# Altium PCB AudioAmp.PcbDoc
Units mm, origin at the board's own origin, x right, y up, seen from the top; angles counter-clockwise.
Board outline 65 x 48 mm, 2 copper layers (Top Layer, Bottom Layer); 152 components, 63 nets, 384 pads, 64 vias.
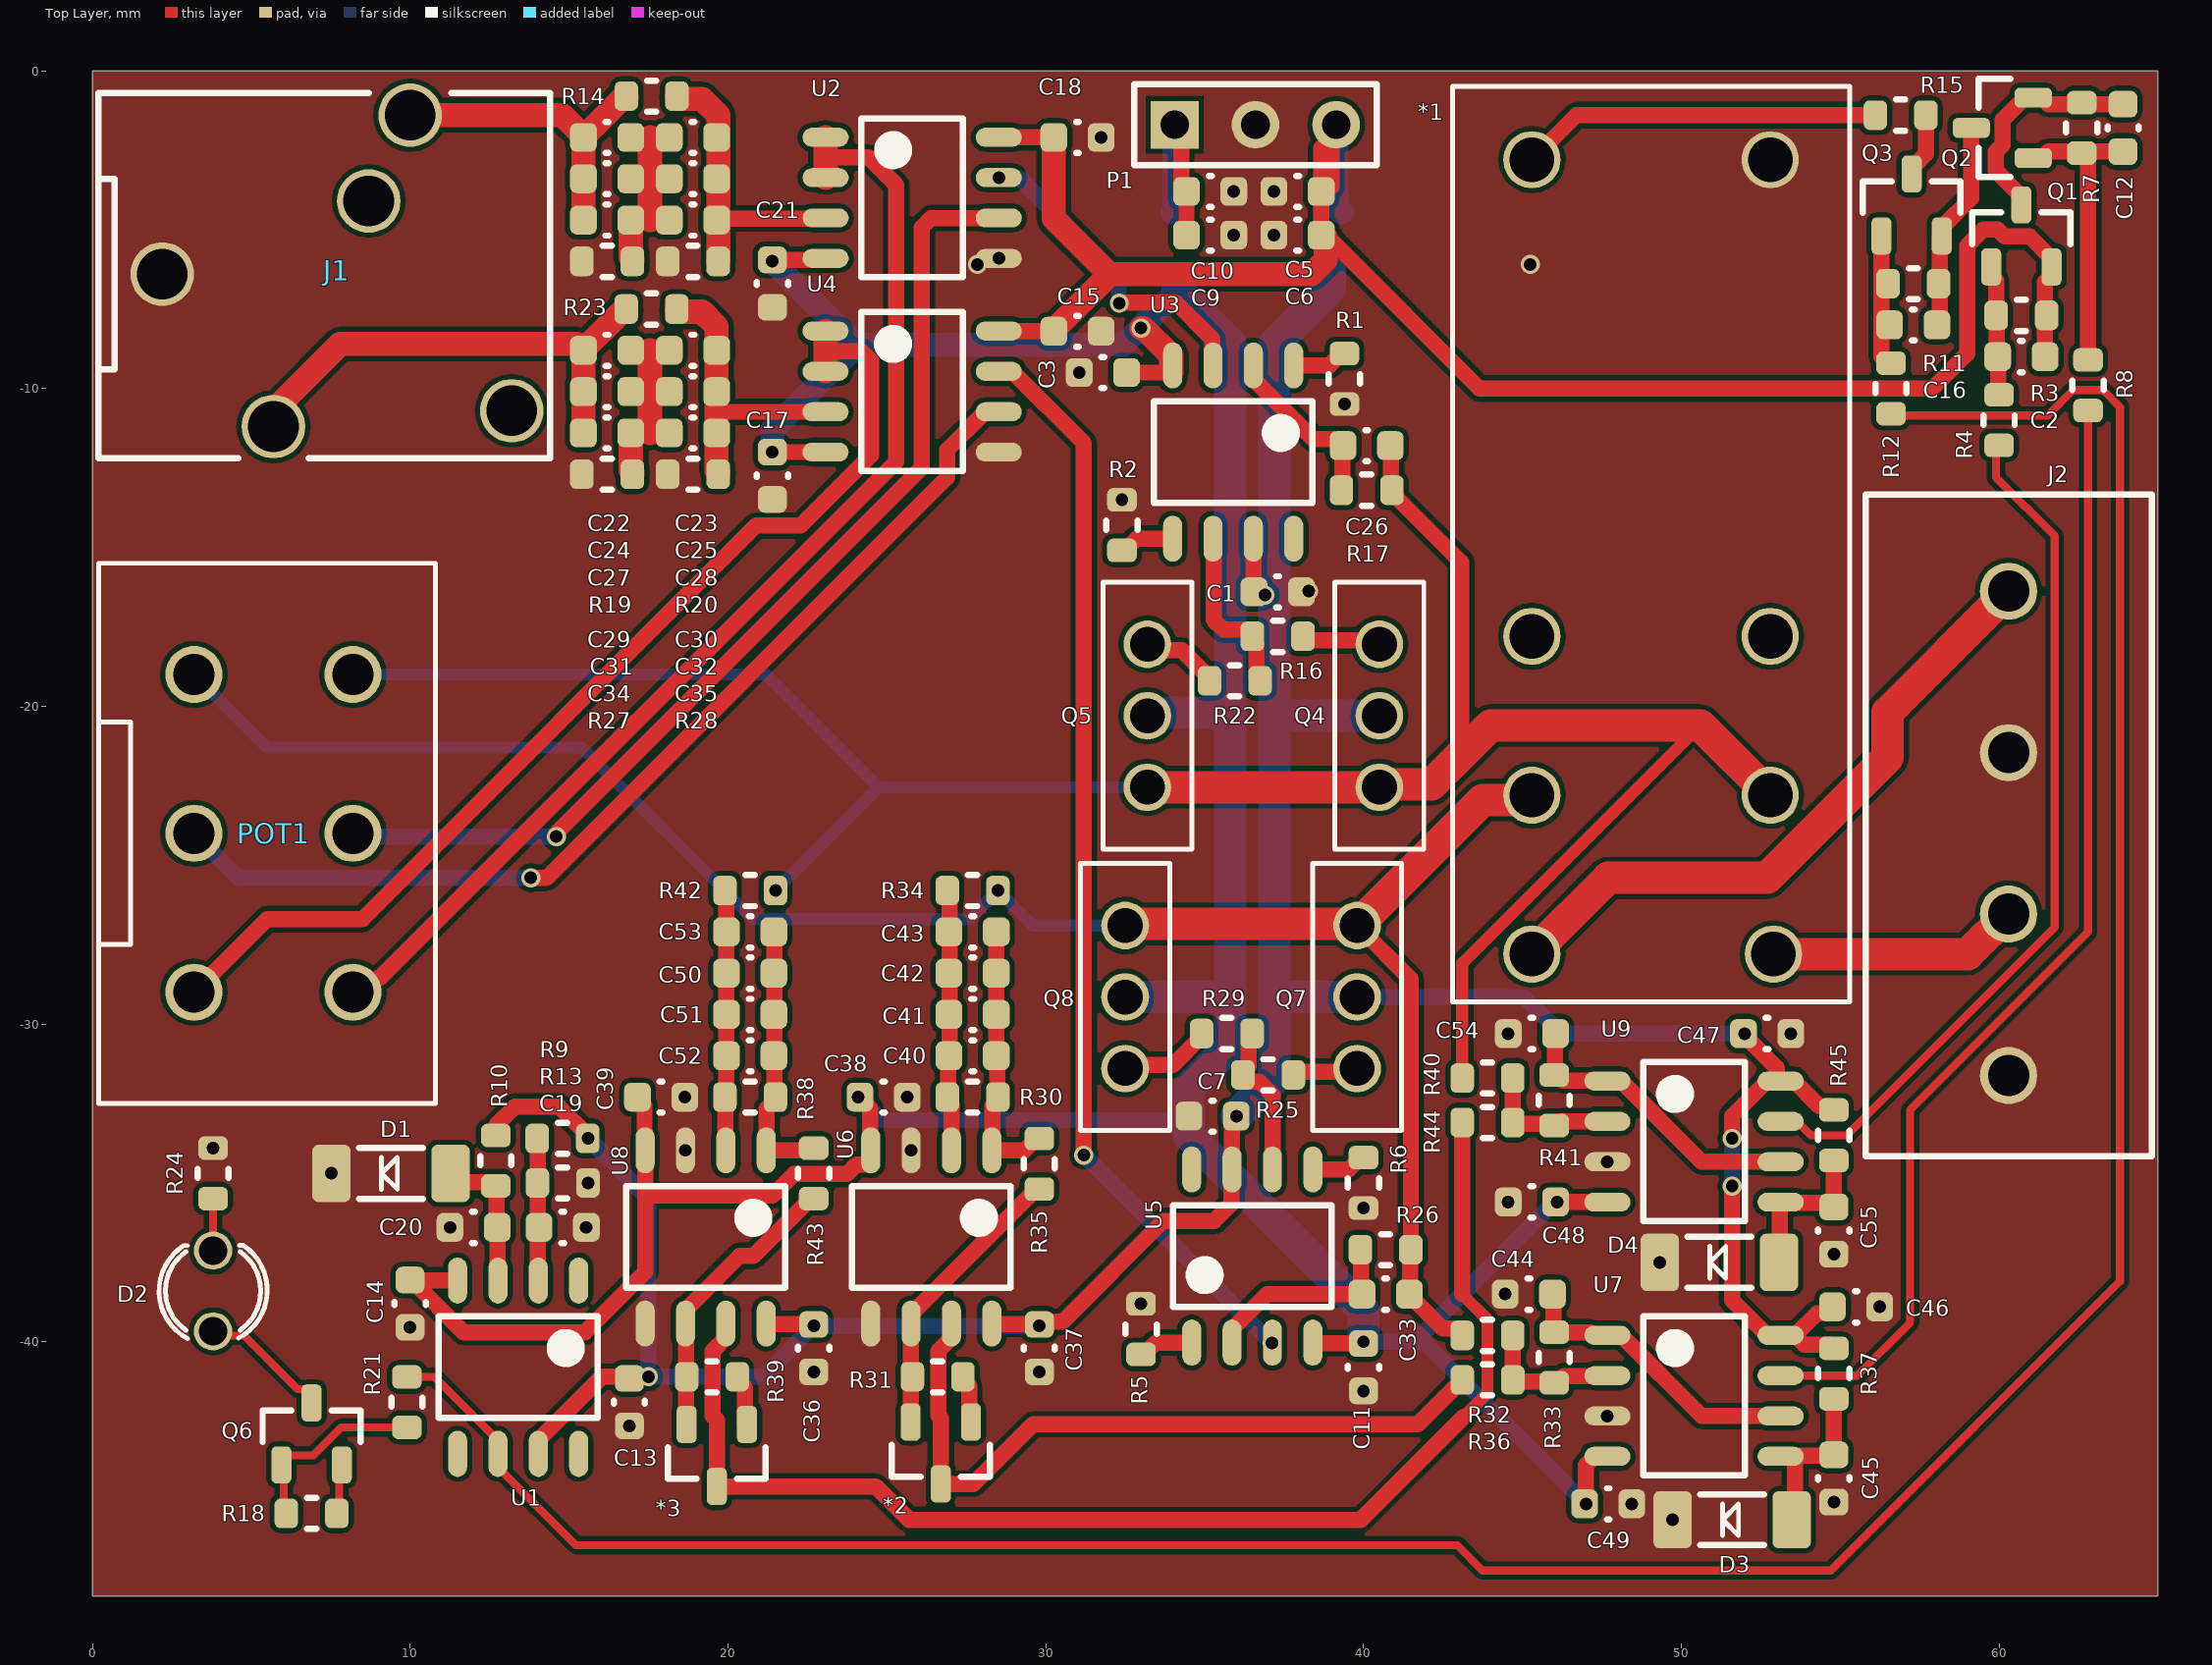
[diagram p0: Top Layer view]
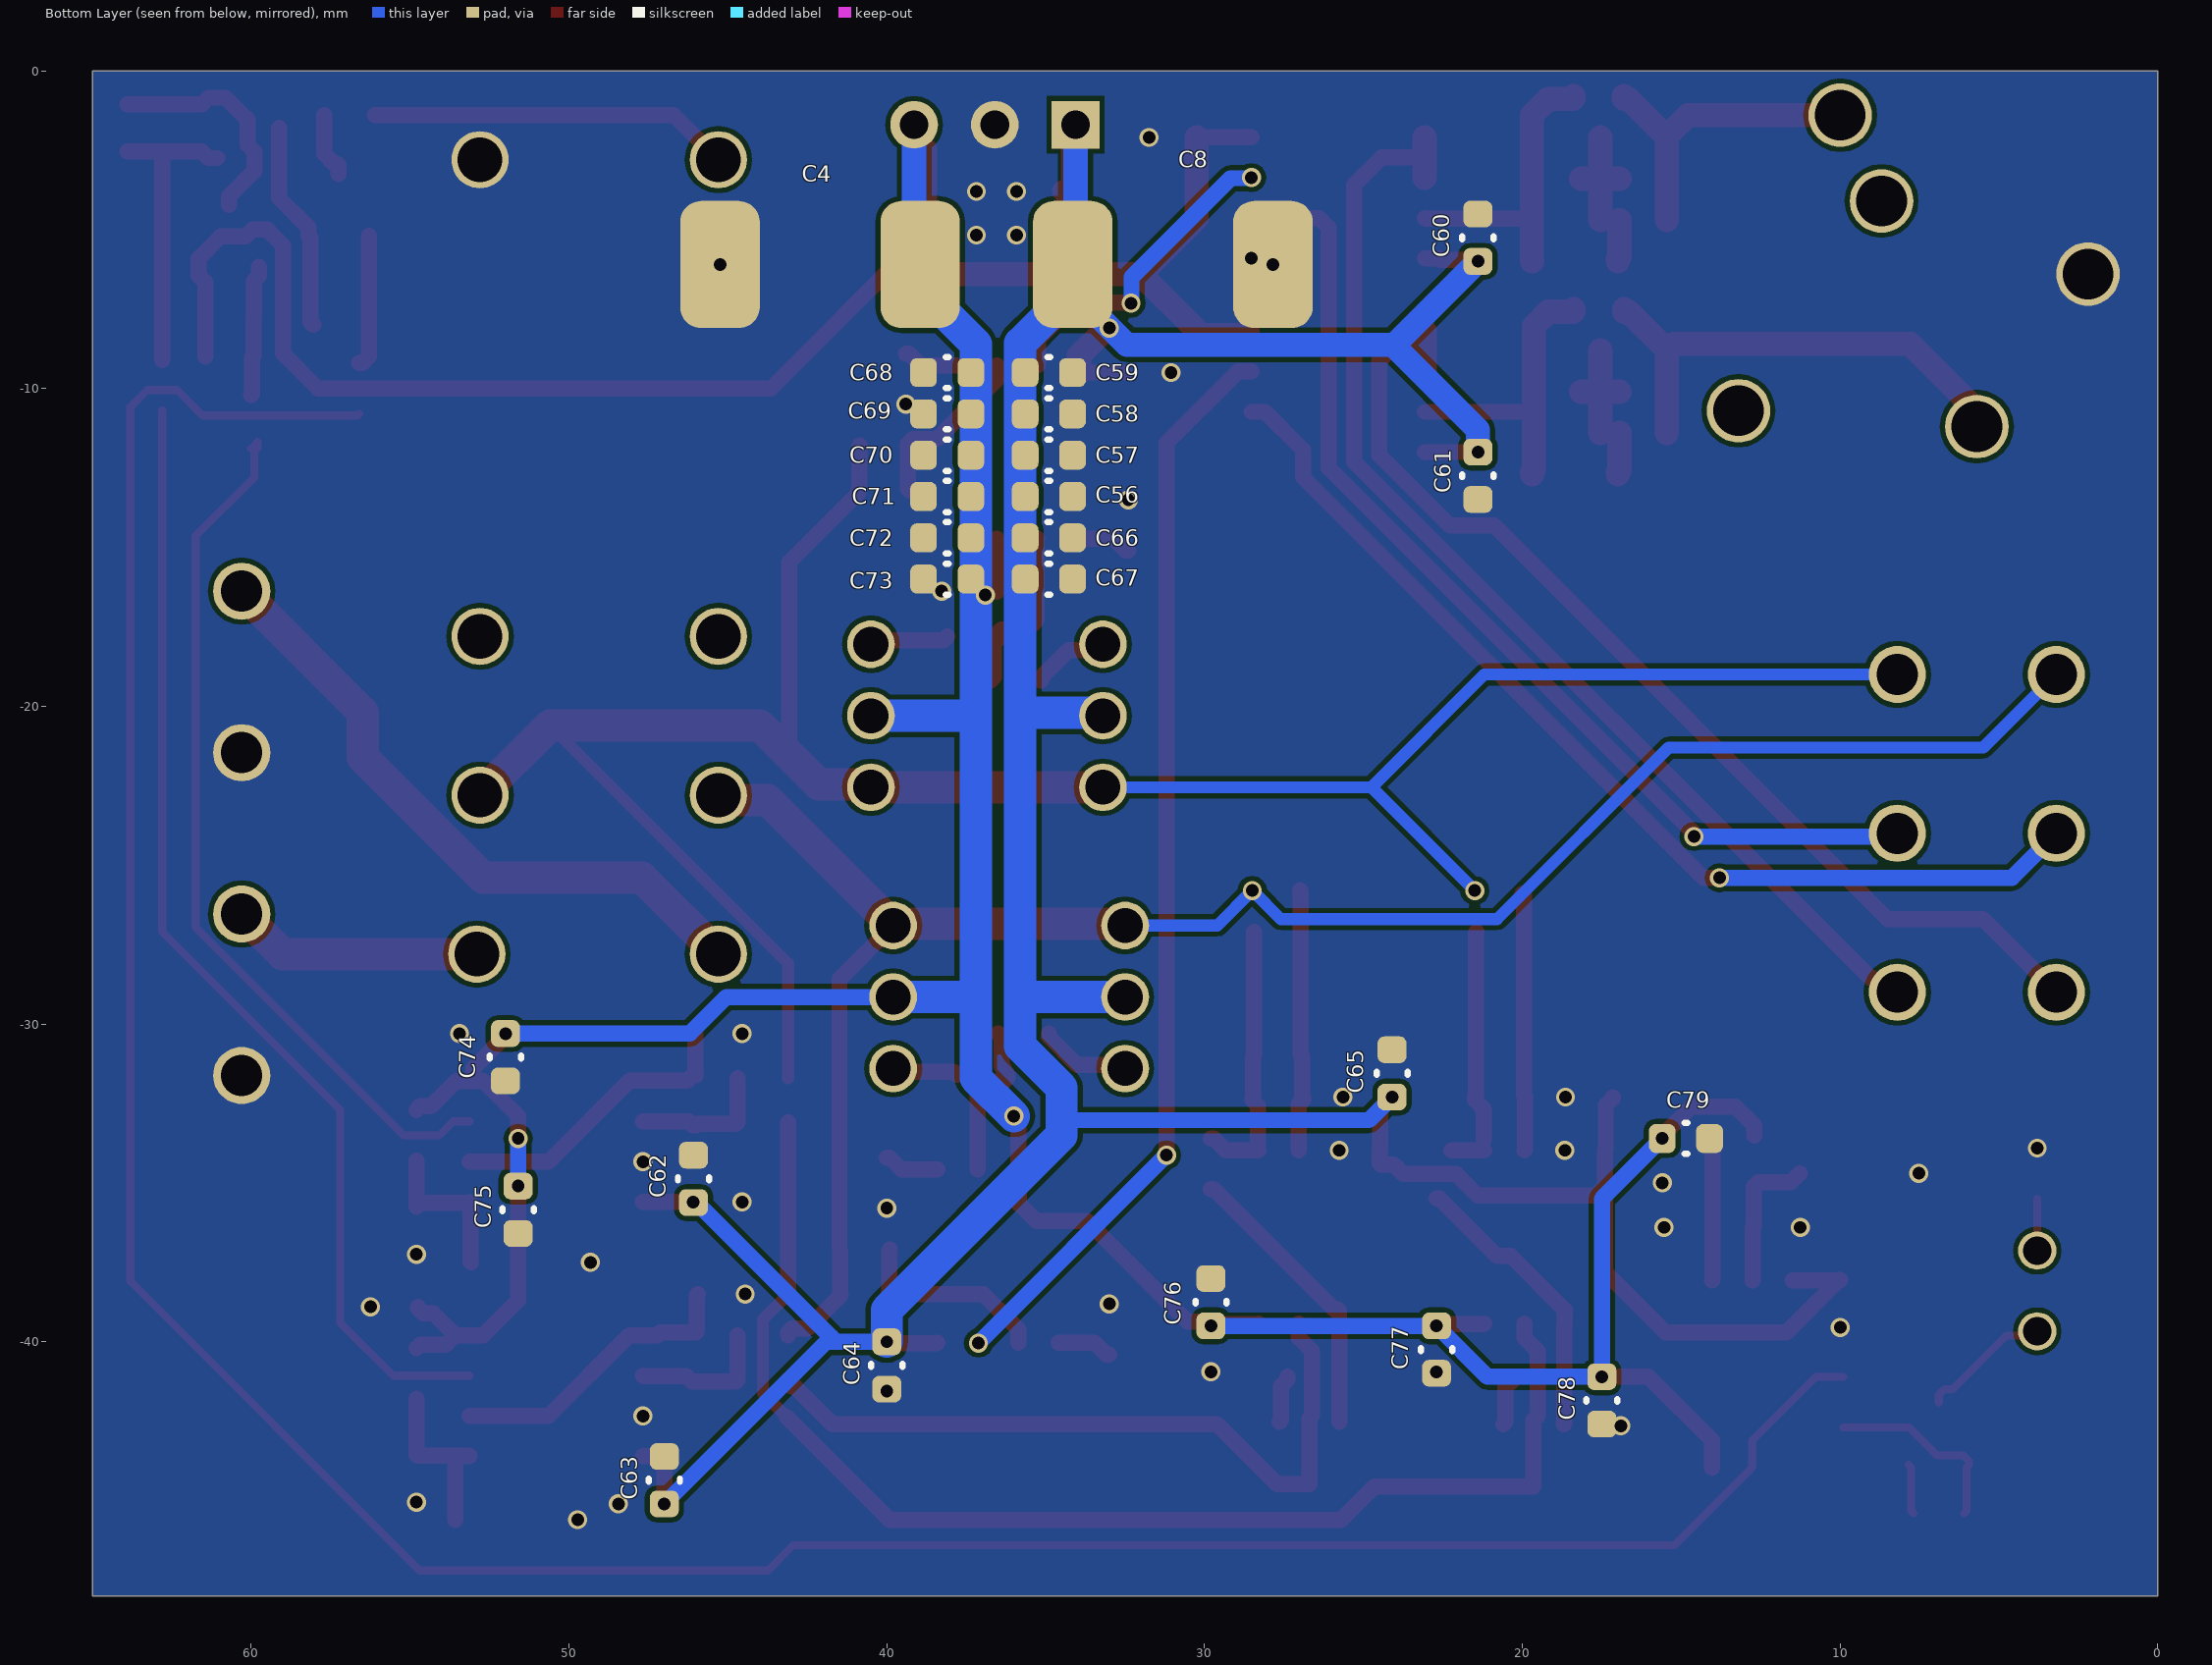
[diagram p1: Bottom Layer view, seen from below]
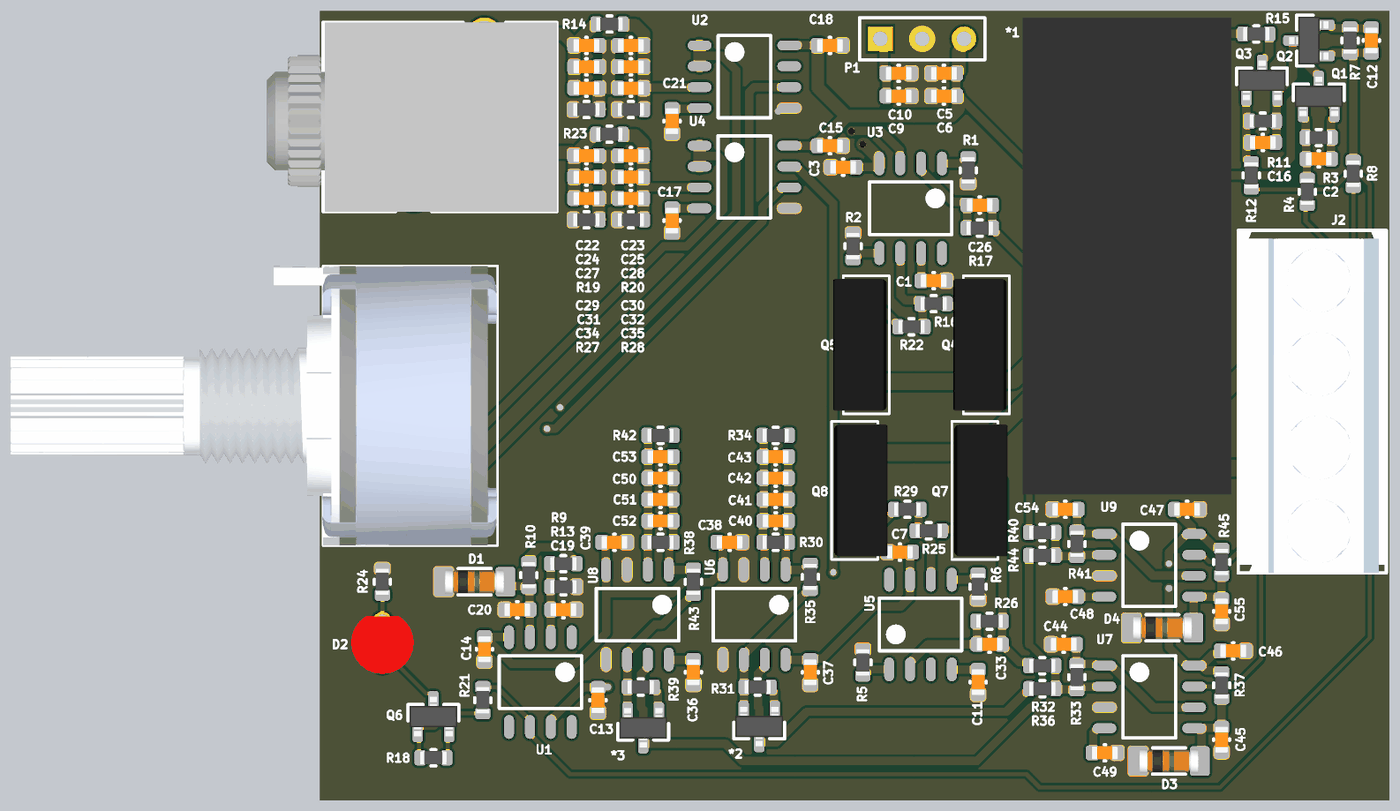
[diagram p2: 3D render of the assembled board from above, using the file's embedded part models]
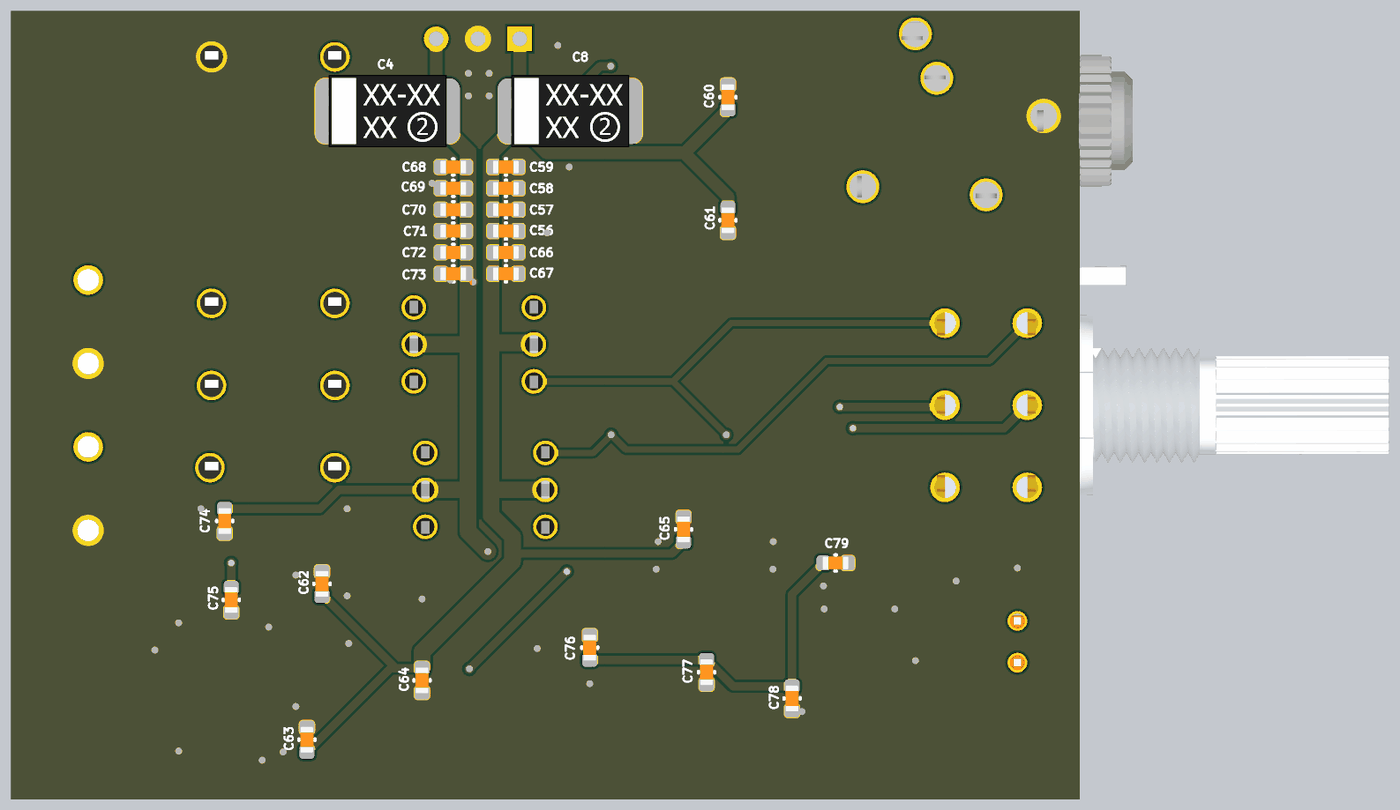
[diagram p3: 3D render of the assembled board from below, using the file's embedded part models]

## Layer stack, top to bottom
Top Solder: solder mask 0.0102, Solder Resist, Dk 3.5
Top Layer: signal copper 0.0356
Dielectric 1: dielectric 0.32, FR-4, Dk 4.8
Bottom Layer: signal copper 0.0356
Bottom Solder: solder mask 0.0102, Solder Resist, Dk 3.5

## Board outline
0,-48 0,0 65,0 65,-48

## Design rules (kind name [scope] priority, off if disabled: settings)
Clearance [All] p1: gap=0.15 ignorepadtopadclearanceinfootprint=FALSE except(0: Arc-Hole Track-Hole SMDPad-Hole THPad-Hole Via-Hole Fill-Hole Poly-Hole Region-Hole Text-Hole)
HoleSize [All] p1: absolutevalues=TRUE maxlimit=6.3 minlimit=0.2 maxpercent=80.000 minpercent=20.000
MinimumSolderMaskSliver [All] p1: minsoldermaskwidth=0.15
PlaneConnect [All] p1: planeconnectstyle=Direct reliefexpansion=0.508 reliefentries=4 reliefconductorwidth=0.254 reliefairgap=0.254
PolygonConnect [All] p1: connectstyle=Direct reliefconductorwidth=0.254 reliefentries=4 polygonreliefangle="90 Angle" airgapwidth=0.254
RoutingVias [All] p1: holewidth=0.6 width=0.35 viastyle="Through Hole" minholewidth=0.35 minwidth=0.3 maxholewidth=1.7 maxwidth=1.5
SilkToSilkClearance [All] p1: silktosilkclearance=0.15
SilkToSolderMaskClearance [IsPad] p1: minsilkscreentomaskgap=0.08 clearancetoexposedcopper=TRUE
SolderMaskExpansion [All] p1: expansion=0.045 istentingtop=FALSE
Width [All] p1: maxlimit=1.524 minlimit=0.203 preferedwidth=0.254 minimp=50.000000 maximp=50.000000 favimp=50.000000
25 further rules are at their usual default settings.

## Classes and differential pairs
channel class DC_DETECT: U_DC_DETECT1 U_DC_DETECT2
component class U_DC_DETECT2: *2_U_DC_DETECT2 *3 C36_U_DC_DETECT2 C37_U_DC_DETECT2 C38_U_DC_DETECT2 C39_U_DC_DETECT2 C40_U_DC_DETECT2 C41_U_DC_DETECT2 C42_U_DC_DETECT2 C43_U_DC_DETECT2 C44_U_DC_DETECT2 C45_U_DC_DETECT2 C46 C47 C48 C49 C50 C51 C52 C53 C54 C55 D3_U_DC_DETECT2 D4 R30_U_DC_DETECT2 R31_U_DC_DETECT2 R32_U_DC_DETECT2 R33_U_DC_DETECT2 R34_U_DC_DETECT2 R35_U_DC_DETECT2 R36_U_DC_DETECT2 R37_U_DC_DETECT2 R38 R39 R40 R41 R42 R43 R44 R45 U6_U_DC_DETECT2 U7_U_DC_DETECT2 U8 U9
component class U_DC_DETECT1: *2 *2_U_DC_DETECT1 C36 C36_U_DC_DETECT1 C37 C37_U_DC_DETECT1 C38 C38_U_DC_DETECT1 C39 C39_U_DC_DETECT1 C40 C40_U_DC_DETECT1 C41 C41_U_DC_DETECT1 C42 C42_U_DC_DETECT1 C43 C43_U_DC_DETECT1 C44 C44_U_DC_DETECT1 C45 C45_U_DC_DETECT1 D3 D3_U_DC_DETECT1 R30 R30_U_DC_DETECT1 R31 R31_U_DC_DETECT1 R32 R32_U_DC_DETECT1 R33 R33_U_DC_DETECT1 R34 R34_U_DC_DETECT1 R35 R35_U_DC_DETECT1 R36 R36_U_DC_DETECT1 R37 R37_U_DC_DETECT1 U6 U6_U_DC_DETECT1 U7 U7_U_DC_DETECT1
component class AudioAmp: *1 C1 C2 C3 C4 C5 C6 C7 C8 C9 C10 C11 C12 C13 C14 C15 C16 C17 C18 C19 C20 C21 C22 C23 C24 C25 C26 C27 C28 C29 C30 C31 C32 C33 C34 C35 C56 C57 C58 C59 C60 C61 C62 C63 C64 C65 C66 C67 C68 C69 C70 C71 C72 C73 C74 C75 C76 C77 C78 C79 D1 D2 J1 J2 P1 POT1 Q1 Q2 Q3 Q4 Q5 Q6 Q7 Q8 R1 R2 R3 R4 R5 R6 R7 R8 R9 R10 R11 R12 R13 R14 R15 R16 R17 R18 R19 R20 R21 R22 R23 R24 R25 R26 R27 R28 R29 R30_U_DC_DETECT1 R31_U_DC_DETECT1 U1 U2 U3 U4 U5

## Components (designator, comment, footprint, x,y, rotation, side; value= is the part's Value field where it differs from the comment)
*1 "RELAY_G2RL-2" G2RL-2 49.05,-14.9 r270 top
*2 "BAV99" SOT23_123_N 26.7,-43.5 r180 top
*3 "BAV99" SOT23_123_N 19.65,-43.575 r180 top (schematic designator *2)
C1 "100n" C0603_N 37.3,-16.4 r180 top
C2 "100n" C0603_N 60.7,-9 r0 top
C3 "100n" C0603_N 31.8,-9.5 r0 top
C4 "100u" C_TR3D 42.1,-6.1 r180 bottom
C5 "100n" C0603_N 37.925,-3.8 r180 top
C6 "100n" C0603_N 37.925,-5.175 r180 top
C7 "100n" C0603_N 35.25,-32.9 r0 top
C8 "100u" C_TR3D 31,-6.1 r180 bottom
C9 "100n" C0603_N 35.175,-5.175 r180 top
C10 "100n" C0603_N 35.175,-3.8 r180 top
C11 "100n" C0603_N 40,-40.8 r90 top
C12 "100n" C0603_N 63.9,-1.8 r90 top
C13 "CAP" C0603_N 16.9,-41.9 r90 top
C14 "CAP" C0603_N 10,-38.8 r90 top
C15 "100n" C0603_N 31,-8.2 r180 top
C16 "100n" C0603_N 57.3,-8 r0 top
C17 "100n" C0603_N 21.4,-12.745 r90 top
C18 "100n" C0603_N 31,-2.1 r180 top
C19 "100n" C0603_N 14.8,-36.4 r0 top (schematic designator C20)
C20 "100n" C0603_N 12,-36.4 r180 top (schematic designator C19)
C21 "100n" C0603_N 21.4,-6.7 r90 top
C22 "100n" C0603_N 16.2,-2.1 r0 top (schematic designator C29)
C23 "100n" C0603_N 18.9,-2.1 r0 top (schematic designator C30)
C24 "100n" C0603_N 16.2,-3.4 r0 top (schematic designator C32)
C25 "100n" C0603_N 18.9,-3.4 r0 top (schematic designator C31)
C26 "5p" C0603_N 40.1,-11.8 r180 top
C27 "100n" C0603_N 16.2,-4.7 r0 top (schematic designator C34)
C28 "100n" C0603_N 18.9,-4.7 r0 top (schematic designator C35)
C29 "100n" C0603_N 16.2,-8.8 r0 top (schematic designator C22)
C30 "100n" C0603_N 18.9,-8.8 r0 top (schematic designator C23)
C31 "100n" C0603_N 16.2,-10.1 r0 top (schematic designator C24)
C32 "100n" C0603_N 18.9,-10.1 r0 top (schematic designator C25)
C33 "5p" C0603_N 40.7,-38.5 r180 top
C34 "100n" C0603_N 16.2,-11.4 r0 top (schematic designator C27)
C35 "100n" C0603_N 18.9,-11.4 r0 top (schematic designator C28)
C36 "100n" C0603_N 22.7,-40.2 r270 top (schematic designator C42)
C37 "100n" C0603_N 29.8,-40.2 r270 top (schematic designator C43)
C38 "100n" C0603_N 24.9,-32.3 r180 top (schematic designator C44)
C39 "100n" C0603_N 17.9,-32.3 r180 top (schematic designator C45)
C40 "100n" C0603_N 27.7,-31 r0 top (schematic designator C36)
C41 "100n" C0603_N 27.7,-29.7 r0 top (schematic designator C37)
C42 "100n" C0603_N 27.7,-28.4 r0 top (schematic designator C38)
C43 "100n" C0603_N 27.7,-27.1 r0 top (schematic designator C39)
C44 "100n" C0603_N 45.2,-38.5 r0 top (schematic designator C40)
C45 "100n" C0603_N 54.8,-44.3 r90 top (schematic designator C41)
C46 "100n" C0603_N 55.5,-38.9 r0 top (schematic designator C42)
C47 "100n" C0603_N 52.7,-30.3 r0 top (schematic designator C43)
C48 "100n" C0603_N 45.3,-35.6 r0 top (schematic designator C44)
C49 "100n" C0603_N 47.7,-45.1 r180 top (schematic designator C45)
C50 "100n" C0603_N 20.7,-28.4 r0 top (schematic designator C36)
C51 "100n" C0603_N 20.7,-29.7 r0 top (schematic designator C37)
C52 "100n" C0603_N 20.7,-31 r0 top (schematic designator C38)
C53 "100n" C0603_N 20.7,-27.1 r0 top (schematic designator C39)
C54 "100n" C0603_N 45.3,-30.3 r0 top (schematic designator C40)
C55 "100n" C0603_N 54.8,-36.5 r90 top (schematic designator C41)
C56 "100n" C0603_N 34.9,-13.4 r0 bottom
C57 "100n" C0603_N 34.9,-12.1 r0 bottom
C58 "100n" C0603_N 34.9,-10.8 r0 bottom
C59 "100n" C0603_N 34.9,-9.5 r0 bottom
C60 "100n" C0603_N 21.4,-5.255 r270 bottom
C61 "100n" C0603_N 21.4,-12.745 r90 bottom
C62 "100n" C0603_N 46.082,-34.873 r270 bottom
C63 "100n" C0603_N 47,-44.355 r270 bottom
C64 "100n" C0603_N 40,-40.745 r90 bottom
C65 "100n" C0603_N 24.1,-31.555 r270 bottom
C66 "100n" C0603_N 34.9,-14.7 r0 bottom
C67 "100n" C0603_N 34.9,-16 r0 bottom
C68 "100n" C0603_N 38.1,-9.5 r0 bottom
C69 "100n" C0603_N 38.1,-10.8 r0 bottom
C70 "100n" C0603_N 38.1,-12.1 r0 bottom
C71 "100n" C0603_N 38.1,-13.4 r0 bottom
C72 "100n" C0603_N 38.1,-14.7 r0 bottom
C73 "100n" C0603_N 38.1,-16 r0 bottom
C74 "100n" C0603_N 52,-31.045 r270 bottom
C75 "100n" C0603_N 51.6,-35.845 r270 bottom
C76 "100n" C0603_N 29.8,-38.755 r90 bottom
C77 "100n" C0603_N 22.7,-40.245 r270 bottom
C78 "100n" C0603_N 17.5,-41.845 r270 bottom
C79 "100n" C0603_N 14.855,-33.6 r180 bottom
D1 "1N4148" SOD-80 9.4,-34.7 r0 top
D2 "LED" LED_3mm 3.8,-38.4 r90 top
D3 "1N4148" SOD-80 51.6,-45.6 r0 top
D4 "1N4148" SOD-80 51.2,-37.5 r0 top (schematic designator D3)
J1 "JACK_STEREO" "1503 09" 0.2,-6.4 r270 top (schematic designator J2)
J2 "282841-4" TERM_BLOCK_4x1 60.3,-24 r270 top (schematic designator J1)
P1 "Header 3" HDR1X3 34.06,-1.7 r0 top
POT1 "RES_POT_S" POT_STEREO 5.7,-24 r90 top
Q1 "BSS84" SOT23_123_N 60.7,-5.2 r0 top
Q2 "BSS84" SOT23_123_N 60.1,-1.8 r90 top
Q3 "BSS84" SOT23_123_N 57.25,-4.225 r0 top
Q4 "BJT_NPN" TO-126 40.5,-20.3 r90 top
Q5 "BJT_PNP" TO-126 33.2,-20.3 r90 top
Q6 "BSS84" SOT23_123_N 6.9,-42.9 r0 top
Q7 "BJT_NPN" TO-126 39.8,-29.15 r270 top
Q8 "BJT_PNP" TO-126 32.5,-29.15 r270 top
R1 "Test" R0603_N 39.4,-9.695 r270 top
R2 "Test" R0603_N 32.4,-14.3 r90 top
R3 "1k" R0603_N 60.7,-7.7 r0 top
R4 "1k" R0603_N 60,-10.995 r90 top
R5 "Test" R0603_N 33,-39.6 r90 top
R6 "Test" R0603_N 40,-35 r270 top
R7 "1k" R0603_N 62.6,-1.8 r90 top
R8 "1k" R0603_N 62.8,-9.9 r90 top
R9 "1k" R0603_N 14.795,-33.6 r0 top
R10 "10" R0603_N 12.7,-34.3 r90 top
R11 "1k" R0603_N 57.3,-6.7 r0 top
R12 "RES" R0603_N 56.6,-10 r90 top
R13 "10" R0603_N 14.8,-35 r180 top
R14 "DNP" R0603_N 17.6,-0.8 r0 top (schematic designator R21)
R15 "220" R0603_N 56.9,-1.4 r0 top
R16 "0" R0603_N 37.3,-17.8 r0 top
R17 "10k" R0603_N 40.1,-13.2 r180 top
R18 "RES" R0603_N 6.9,-45.4 r0 top
R19 "330k" R0603_N 16.2,-6 r180 top
R20 "330k" R0603_N 18.9,-6 r180 top
R21 "RES" R0603_N 9.9,-41.9 r270 top
R22 "0" R0603_N 35.95,-19.2 r180 top
R23 "DNP" R0603_N 17.595,-7.5 r0 top
R24 "1k" R0603_N 3.8,-34.7 r270 top
R25 "0" R0603_N 37,-31.6 r0 top
R26 "10k" R0603_N 40.695,-37.1 r180 top
R27 "330k" R0603_N 16.2,-12.7 r180 top
R28 "330k" R0603_N 18.9,-12.7 r180 top
R29 "0" R0603_N 35.7,-30.3 r180 top
R30 "100k" R0603_N 27.7,-32.3 r0 top
R31 "10k" R0603_N 26.6,-41.1 r0 top
R32 "5k" R0603_N 43.9,-39.8 r0 top
R33 "10k" R0603_N 46,-40.495 r90 top
R34 "100k" R0603_N 27.7,-25.8 r180 top
R35 "10k" R0603_N 29.8,-34.4 r270 top
R36 "10k" R0603_N 43.905,-41.2 r0 top
R37 "10k" R0603_N 54.8,-41 r90 top
R38 "100k" R0603_N 20.7,-32.3 r0 top (schematic designator R30)
R39 "10k" R0603_N 19.5,-41.1 r0 top (schematic designator R31)
R40 "5k" R0603_N 43.9,-31.7 r0 top (schematic designator R32)
R41 "10k" R0603_N 46,-32.4 r90 top (schematic designator R33)
R42 "100k" R0603_N 20.7,-25.8 r180 top (schematic designator R34)
R43 "10k" R0603_N 22.7,-34.7 r270 top (schematic designator R35)
R44 "10k" R0603_N 43.9,-33.1 r0 top (schematic designator R36)
R45 "10k" R0603_N 54.8,-33.5 r90 top (schematic designator R37)
U1 "uA741" SOIC-8 13.4,-40.8 r270 top (schematic designator U2)
U2 "TL072" SOIC-8 25.8,-4 r0 top (schematic designator U4)
U3 "LM318" SOIC-8 35.9,-12 r270 top (schematic designator U1)
U4 "TL072" SOIC-8 25.797,-10.098 r0 top (schematic designator U5)
U5 "LM318" SOIC-8 36.5,-37.3 r90 top (schematic designator U3)
U6 "LM258" SOIC-8 26.4,-36.7 r270 top (schematic designator U7)
U7 "LM258" SOIC-8 50.4,-41.7 r0 top (schematic designator U8)
U8 "LM258" SOIC-8 19.3,-36.7 r270 top (schematic designator U7)
U9 "LM258" SOIC-8 50.4,-33.7 r0 top (schematic designator U8)

## Footprints (in the part's own frame and the unit in brackets; to place one, negate y for a bottom-side part, rotate by r counter-clockwise, add the part's x,y. Pads: shape width x height; smd on the part's side, far side on the other; paste and mask are expansions set on the pad)
"1503 09" [mm] "jack connector, 3.5mm"
  round 2 hole 1.6: 1(0,2) 2(-5,9.8) 3(4.8,5.5) 4(-2.3,8.5) 5(4.3,13)
  silkscreen extent -5.7,0 5.8,14.2, body extent -5.7,-3.4 5.8,14.2, height 7
C0603_N [mm] "Capacitor, Chip; 1.60 mm L X 0.80 mm W X 0.87 mm H body"
  rrect50% 0.84x0.91 smd: 1(-0.745,0) 2(0.745,0)
  silkscreen extent -0.05,-0.49 0.05,0.49, body extent -0.8,-0.4 0.8,0.4, height 0.87
C_TR3D [mm] "Capacitor, 7.3 mm L X 4.3 mm W X 2.8 mm H body"
  rrect52% 2.5x4 smd: N(-3.15,0) P(3.15,0)
  body extent -3.59,-2.21 3.6,2.21, height 2.93
G2RL-2 [mm] "Omron G2RL-2 relay"
  round 1.8 hole 1.4: 1(-12.1,-3.75) 2(2.9,-3.75) 3(7.9,-3.75) 4(12.9,-3.75) 5(12.9,3.85) 6(7.9,3.75) 7(2.9,3.75) 8(-12.1,3.75)
  silkscreen extent -14.4,-6.25 14.4,6.25, body extent -14.5,-6.35 14.5,6.35, height 15.7
HDR1X3 [mm] "Connector; Header; 3 Position"
  rect 1.5x1.5 hole 0.9: 1(0,0)
  round 1.5 hole 0.9: 2(2.54,0) 3(5.08,0)
  silkscreen extent -1.27,-1.27 6.35,1.27
LED_3mm [mm] "LED, 3mm, THT"
  round 1.2 hole 0.9: A(-1.27,0) K(1.27,0)
  silkscreen extent -1.5,-1.7 1.43,1.7, body extent -1.9,-1.9 1.6,1.9, height 6.5
POT_STEREO [mm] "Stereo Potentio meter, 6mm axis"
  round 1.8 hole 1.3: 1(-5,2.5) 2(0,2.5) 3(5,2.5) 4(-5,-2.5) 5(0,-2.5) 6(5,-2.5)
  silkscreen extent -8.5,-5.1 8.5,5.5, body extent -8.5,-5.05 8.5,24.5, height 21.5
R0603_N [mm] "Resistor, Chip; 1.60 mm L X 0.80 mm W X 0.55 mm H body"
  rrect51% 0.74x0.93 smd: 1(-0.795,0) 2(0.795,0)
  silkscreen extent -0.15,-0.49 0.15,0.49, body extent -0.8,-0.4 0.8,0.4, height 0.55
SOD-80 [mm] "SOD-80"
  rrect30% 1.2x1.8 smd: A(1.875,0) C(-1.875,0)
  silkscreen extent -1,-0.8 1,0.8, body extent -1.8,-0.75 1.8,0.75, height 1.5
SOIC-8 [mm] "SOIC, 8-Leads, Body 4.90x3.90mm, Pitch 1.27mm, IPC Medium Density"
  oval 1.45x0.6 smd: 1(-2.725,1.905) 2(-2.725,0.635) 3(-2.725,-0.635) 4(-2.725,-1.905) 5(2.725,-1.905) 6(2.725,-0.635) 7(2.725,0.635) 8(2.725,1.905)
  silkscreen extent -1.6,-2.5 1.6,2.5, body extent -2,-2.5 2,2.5, height 1.75
SOT23_123_N [mm] "Small Outline Transistor (SOT23), 0.95 mm pitch; 3 pin, 2.90 mm L X 1.30 mm W X 1.10 mm H body"
  rrect51% 0.63x1.17 smd: 1(-0.95,-0.975) 2(0.95,-0.975) 3(0,0.975)
  silkscreen extent -1.54,-0.25 1.54,0.74, body extent -1.45,-1.2 1.45,1.2, height 1.1
TERM_BLOCK_4x1 [mm] "TERMINAL BLOCK, TE CONNECTIVITY 282841-4"
  round 1.8 hole 1.3: 1(-7.62,0) 2(-2.54,0) 3(2.54,0) 4(7.62,0)
  silkscreen extent -10.66,-4.5 10.16,4.5, body extent -10.66,-4.55 10.16,4.45, height 15.2
TO-126 [mm] "TO-126"
  round 1.5 hole 1.1: B(2.25,0) C(0,0) E(-2.25,0)
  silkscreen extent -4.2,-1.4 4.2,1.4, body extent -4,-1.25 4,2, height 24.94

## Part data
C1 C2 C3 C5 C6 C7 C9 C10 C11 C12 C15 C16 C17 C18 C19 C20 C21 C22 C23 C24 C25 C26 C27 C28 C29 C30 C31 C32 C33 C34 C35 C36 C37 C38 C39 C40 C41 C42 C43 C44 C45 C46 C47 C48 C49 C50 C51 C52 C53 C54 C55 C56 C57 C58 C59 C60 C61 C62 C63 C64 C65 C66 C67 C68 C69 C70 C71 C72 C73 C74 C75 C76 C77 C78 C79: library part CAP, RevS="$Rev:: 58        $"
C4 C8: library part CAP_POL, RevS="$Rev:: 58        $"
D1 D3 D4: library part DIODE
J1: "3,5mm Stereo Jack connector, Lumberg 1503 09 type"
J2: library part SOCHDR_4X1, "Socket", ComponentLink1Description=Manufacturer, ComponentLink1URL=http://www.we-online.de, ComponentLink2Description=Datasheet, ComponentLink2URL=http://katalog.we-online.de/em/datasheet/691412320002.pdf
P1: "Header, 3-Pin", LatestRevisionDate=17-Jul-2002, LatestRevisionNote="Re-released for DXP Platform.", Publisher="Altium Limited"
POT1: "Stereo"
Q1 Q2 Q3 Q6: library part MOSFET_P
R1 R2 R3 R4 R5 R6 R7 R8 R9 R10 R11 R13 R14 R15 R16 R17 R19 R20 R22 R23 R24 R25 R26 R27 R28 R29 R30 R31 R32 R33 R34 R35 R36 R37 R38 R39 R40 R41 R42 R43 R44 R45: library part RES
U2 U4: "Dual op. amp."
U6 U7 U8 U9: "Dual op. amp., 3..36V, Iq=300uA"
C13 C14: RevS="$Rev:: 58        $"

## Via types
v1: diameter 0.6, hole 0.4, Top Layer to Bottom Layer, tented both sides, 64 vias

## Nets (pads, with @x,y where several pads share a name; then routed paths per layer and width w, separated by ;. In a path a pad name is that pad's centre, name@x,y a point inside that pad or via, vN(x,y) a via of type N, cw(c..) or ccw(c..) an arc to the next point about the centre after c; other vN are vias at no path point)
+15: C1.2 C2.2 C4.P C5.1 C6.1 C7.2 C13.2 C15.2 C18.2 C36.1 C37.1 C46.1 C47.1 C68.1 C69.1 C70.1 C71.1 C72.1 C73.1 C74.1 C75.1 C76.1 C77.1 C78.1 C79.1 P1.3 Q1.2 Q4.C Q7.C R3.2 R9.2 R10.2 R37.2 R45.2 U1.7 U2.8 U3.7 U4.8 U5.7 U6.8 U7.8 U8.8 U9.8 | length 168
  Top Layer w0.508: R10.2 12.7,-33.198 13.298,-32.6 14.685,-32.6 15.59,-33.505 R9.2 ; U1.7@14.035,-43.975 U1.7 14.035,-43.1 16.035,-41.1 v1(17.5,-41.1) ; U8.8 21.22,-39.44 22.685,-39.44 C36.1 ; U6.8 28.32,-39.44 29.785,-39.44 C37.1 29.884,-39.371 30.529,-39.371 33.7,-36.2 35.3,-36.2 35.847,-35.653 35.847,-34.573 35.855,-34.565 C7.2@35.855,-32.91 ; U4.8@28.525,-8.195 28.527,-8.197 30.252,-8.197 C15.2 ; U2.8 28.528,-2.098 30.252,-2.098 C18.2 ; v1(29.8,-39.5) C37.1@29.8,-39.49 ; U3.7 36.545,-14.735 C1.2@36.545,-16.39 ; C6.1 38.67,-3.975 C5.1@38.757,-3.888 ; C5.1 38.67,-2.438 P1.3@38.993,-2.116 ; C6.1@38.795,-5.21 C6.1@38.795,-5.175 ; C6.1@38.845,-5.235 39.011,-5.401 39.046,-5.401 43.645,-10 57.9,-10 59,-8.9 59,-5.5 59.5,-5 59.952,-5 60.166,-5.214 60.959,-5.214 61.65,-5.905 Q1.2 61.65,-6.445 61.445,-6.65 61.445,-7.7 C2.2 ; C5.1@38.993,-3.652 P1.3@38.993,-2.116 ; P1.3@38.993,-1.847 P1.3@38.993,-2.116 ; v1(51.6,-35.1) 51.6,-38.695 52.7,-39.795 U7.8 U7.8@53.575,-39.795 ; v1(51.6,-33.6) 51.6,-32.895 52.7,-31.795 U9.8@53.042,-31.795 ; C47.1@51.96,-30.34 53,-31.38 53,-31.752 U9.8@53.042,-31.795 ; C46.1 54.755,-38.935 54.589,-39.101 54.269,-39.101 U7.8@53.575,-39.795 ; R37.2 54.684,-40.089 53.869,-40.089 U7.8@53.575,-39.795 ; R45.2 54.684,-32.589 54.344,-32.589 53.55,-31.795 U9.8 U9.8@53.042,-31.795
  Top Layer w0.762: C15.2 30.255,-8.165 32.02,-6.4 ; C18.2 30.255,-4.655 32,-6.4 32.02,-6.4 ; C6.1@38.806,-5.239 38.806,-5.954 38.36,-6.4 32.02,-6.4
  Bottom Layer w0.508: v1(15.6,-33.6) 17.5,-35.5 v1(17.5,-41.1) 21.1,-41.1 v1(22.7,-39.5) v1(29.8,-39.5) ; Q7.C 45.05,-29.15 46.2,-30.3 v1(52,-30.3) ; v1(51.6,-35.1) v1(51.6,-33.6)
  Bottom Layer w0.762: P1.3 39.14,-4.29 C4.P@39.3,-4.45
  Bottom Layer w1.016: v1(36,-32.9) 37.2,-31.7 37.2,-29.15 ; v1@37.2,-16.5 37.2,-16 37.2,-14.7 C71.1@37.2,-13.4 ; C73.1@37.2,-16.4 37.2,-20.3 ; C71.1@37.2,-13.3 37.2,-12 37.2,-10.8 37.2,-9.4 37.2,-8.6 38.95,-6.85 C4.P ; Q7.C 37.2,-29.15 ; Q4.C 37.2,-20.3 ; 37.2,-29.15 37.2,-20.3
  other v1: 36.9,-16.5
-15: C3.2 C8.N C9.2 C10.2 C11.2 C14.2 C17.2 C21.2 C38.2 C39.2 C48.2 C49.2 C56.2 C57.2 C58.2 C59.2 C60.2 C61.2 C62.2 C63.2 C64.2 C65.2 C66.2 C67.2 P1.1 Q5.C Q8.C U1.4 U2.4 U3.4 U4.4 U5.4 U6.4 U7.4 U8.4 U9.4 | length 132
  Top Layer w0.508: U1.4 11.485,-38.065 C14.2@10.045,-38.065 ; C39.2 17.155,-32.335 17.377,-32.557 17.377,-33.957 17.4,-33.98 17.4,-35.102 ; v1(21.4,-12) 21.403,-12.003 U4.4 U4.4@23.075,-12.005 ; C21.2 22.575,-5.955 22.625,-5.905 U2.4 ; C38.2 24.155,-32.335 24.477,-32.657 24.477,-33.957 U6.4 24.495,-34.375 24.453,-34.418 24.052,-34.418 23.749,-34.721 22.079,-34.721 21.4,-35.4 17.698,-35.4 17.4,-35.102 ; C3.2 U3.4@33.953,-9.5 ; P1.1 34.264,-1.904 34.264,-3.634 C10.2 ; C9.2 34.43,-3.925 34.555,-3.8 34.555,-3.765 C10.2@34.51,-3.72 ; C9.2@34.555,-5.2 C9.2@34.555,-5.175 ; U5.4 38.42,-40.04 C11.2@39.985,-40.04 ; C48.2@46.047,-35.602 47.673,-35.602 U9.4 ; C49.2@46.997,-45.058 46.997,-43.883 47.275,-43.605 U7.4 ; C14.2@10.045,-38.065 10.01,-38.065 C14.2 10.035,-38.055 C14.2@10.045,-38.065 ; C14.2@10.045,-38.065 11.68,-39.7 15.5,-39.7 17.4,-37.8 17.4,-35.102
  Top Layer w0.762: v1(33,-8.1) 33.083,-8.1 33.953,-8.969 U3.4@33.953,-9.5
  Bottom Layer w0.508: v1(24.1,-32.3) 24.825,-33.025 34.5,-33.025 ; v1(40,-40) 41.6,-40 ; v1(46.1,-35.6) C62.2 45.982,-35.618 41.75,-39.85 41.6,-40 ; v1(47,-45.1) 41.9,-40 41.6,-40
  Bottom Layer w0.762: v1(21.4,-12) 21.4,-11.3 24.069,-8.631 ; v1(21.4,-6) 24.031,-8.631 24.069,-8.631 ; C8.N@34,-4.45 34.06,-4.39 P1.1 ; C8.N@34.15,-6.927 32.988,-8.088 32.446,-8.631 24.069,-8.631
  Bottom Layer w1.016: Q8.C 35.55,-29.15 35.8,-28.9 ; Q5.C 33.293,-20.207 35.8,-20.207 ; C8.N@34.15,-6.927 35.8,-8.577 35.8,-9.5 35.8,-10.8 35.8,-12.1 35.8,-13.4 35.8,-14.7 35.8,-16 35.8,-20.207 ; v1(40,-40) 40,-39 34.5,-33.5 34.5,-32 35.8,-30.7 35.8,-29.15 35.8,-20.207
CH1_DC_SIGN: R4.1 U9.7 | length 27.8
  Top Layer w0.254: U9.7 53.643,-33.065 54.078,-33.5 55.2,-33.5 61.75,-26.95 61.75,-14.65 59.9,-12.8 59.9,-11.892 R4.1@59.9,-11.795 ; R4.1@59.802,-11.687 59.802,-11.795 59.802,-11.892 R4.1@60,-11.892
CH2_DC_SIGN: R8.1 U7.7 | length 35.8
  Top Layer w0.254: U7.7 55.535,-41.065 57.2,-39.4 57.2,-32.7 62.8,-27.1 R8.1
GND: *1.8 C1.1 C3.1 C4.N C5.2 C6.2 C7.1 C8.P C9.1 C10.1 C11.1 C13.1 C14.1 C15.1 C17.1 C18.1 C19.2 C20.2 C21.1 C36.2 C37.2 C38.1 C39.1 C44.1 C45.1 C46.2 C47.2 C48.1 C49.1 C54.1 C55.1 C56.1 C57.1 C58.1 C59.1 C60.1 C61.1 C62.1 C63.1 C64.1 C65.1 C66.1 C67.1 C68.2 C69.2 C70.2 C71.2 C72.2 C73.2 C74.2 C75.2 C76.2 C77.2 C78.2 C79.2 D1.C D3.C D4.C J1.1 J2.2 J2.4 P1.2 R1.2 R2.2 R5.2 R6.2 R13.1 R19.2 R20.2 R24.1 R27.2 R28.2 U2.5 U4.5 U6.3 U6.5 U7.3 U8.3 U8.5 U9.3
  other v1: 49.725,-45.6 48.445,-45.1 54.8,-45.045 16.9,-42.645 47.675,-42.335 40,-41.545 22.7,-40.945 29.8,-40.945 10,-39.545 56.245,-38.9 33,-38.805 44.455,-38.5 49.325,-37.5 54.8,-37.245 11.255,-36.4 15.545,-36.4 40,-35.795 44.555,-35.6 15.595,-35 7.525,-34.7 47.675,-34.335 18.665,-33.975 25.765,-33.975 3.8,-33.905 18.645,-32.3 25.645,-32.3 44.555,-30.3 53.445,-30.3 38.275,-16.375 32.4,-13.505 39.4,-10.49 31.055,-9.5 27.85,-6.1 45.25,-6.1 28.525,-5.905 35.92,-5.175 37.18,-5.175 35.92,-3.8 37.18,-3.8 31.745,-2.1
In1: C29.1 C31.1 C34.1 J1.3 R23.1 | length 15.3
  Top Layer w0.762: J1.3@5.7,-10.8 5.7,-10.7 7.8,-8.6 15.255,-8.6 15.381,-8.726 15.416,-8.726 15.455,-8.765 C29.1@15.455,-8.787 ; C34.1 C31.1 C29.1 C29.1@15.455,-8.787 ; R23.1 16.8,-7.573 16.789,-7.584 16.658,-7.584 C29.1@15.455,-8.787
In2: C22.1 C24.1 C27.1 J1.2 R14.1 | length 10.3
  Top Layer w0.762: J1.2 14.79,-1.4 15.455,-2.065 C22.1@15.455,-2.087 ; C27.1 C24.1 C22.1 C22.1@15.455,-2.087 ; R14.1 16.805,-0.873 16.794,-0.884 16.658,-0.884 C22.1@15.455,-2.087
Net*1_4: *1.4 J2.1 | length 20.6
  Top Layer w1.016: *1.4 47.7,-25.4 52.7,-25.4 56.492,-21.608 56.492,-20.188 J2.1
Net*1_5: *1.5 J2.3 | length 7.9
  Top Layer w1.016: *1.5 59.017,-27.8 60.277,-26.54 J2.3
Net*2_1: *2.1 R31.2 | length 1.5
  Top Layer w0.508: R31.2 27.395,-41.195 27.589,-41.389 27.589,-42.464 *2.1
Net*2_2: *2.2 R31.1 R35.2 U6.6 | length 9.1
  Top Layer w0.508: *2.2 25.758,-42.518 25.758,-39.432 U6.6 25.765,-39.025 25.807,-38.982 25.918,-38.982 29.705,-35.195 R35.2
Net*2_3: *2.3 R36.1 U6.7 | length 23.1
  Top Layer w0.508: U6.7 27.035,-39.875 26.621,-40.289 26.621,-42.322 26.7,-42.401 *2.3 27.725,-44.475 29.6,-42.6 41.71,-42.6 42.899,-41.411 42.994,-41.411 43.11,-41.295 R36.1
Net*3_1: *3.1 R39.2 | length 1.6
  Top Layer w0.508: R39.2 20.295,-41.195 20.539,-41.439 20.539,-42.539 *3.1
Net*3_2: *3.2 R39.1 R43.2 U8.6 | length 9.1
  Top Layer w0.508: *3.2 18.683,-42.582 18.683,-39.442 U8.6 18.665,-39 20.368,-37.297 20.803,-37.297 22.605,-35.495 R43.2
Net*3_3: *3.3 R44.1 U8.7 | length 40.5
  Top Layer w0.381: 43.1,-38.5 43.9,-39.3 43.9,-41.616 43.146,-42.37
  Top Layer w0.508: U8.7 19.935,-39.875 19.521,-40.289 19.521,-42.334 19.65,-42.463 *3.3 24.65,-44.55 25.7,-45.6 39.916,-45.6 43.146,-42.37 ; 43.1,-38.5 43.102,-38.497 43.102,-33.103 R44.1
NetC2_1: C2.1 Q1.1 R3.1 R4.2 | length 4.1
  Top Layer w0.508: Q1.1 59.75,-6.445 59.905,-6.6 R3.1 59.93,-7.725 59.93,-8.975 C2.1 59.978,-9.022 59.978,-10.178 R4.2
NetC12_1: C12.1 Q2.1 R7.1 R8.2 | length 9.6
  Top Layer w0.508: Q2.1 61.345,-2.75 61.55,-2.545 C12.1 ; R7.1 62.684,-2.595 62.8,-2.711 R8.2
NetC12_2: C12.2 Q1.3 Q2.2 R7.2 | length 7.3
  Top Layer w0.508: Q1.3 60.7,-3.955 59.9,-3.155 59.9,-2.548 60.114,-2.334 60.114,-1.541 60.805,-0.85 Q2.2 61.345,-0.85 61.55,-1.055 C12.2
NetC16_1: C16.1 Q3.1 R11.1 R12.2 | length 4.2
  Top Layer w0.508: Q3.1 56.3,-9 56.505,-9.205 R12.2
NetC16_2: C16.2 Q2.3 Q3.2 R11.2 | length 6.6
  Top Layer w0.508: C16.2 58.139,-7.906 58.139,-5.261 Q3.2 58.2,-4.93 59.125,-4.005 Q2.3
NetC19_1: C19.1 R9.1 R13.2 U1.2 | length 4.5
  Top Layer w0.508: R9.1 14.017,-33.618 14.017,-38.057 U1.2
NetC20_1: C20.1 D1.A R10.1 U1.3 | length 4.6
  Top Layer w0.508: D1.A 11.554,-34.979 12.584,-34.979 R10.1 12.722,-35.117 12.722,-36.378 C20.1 12.755,-36.41 12.755,-38.065 U1.3
NetC22_2: C22.2 C23.1 C24.2 C25.1 C27.2 C28.1 R19.1 | length 5.1
  Top Layer w0.762: C27.2 16.945,-5.877 16.995,-5.927 R19.1 ; C24.2 17.55,-3.4 ; 17.55,-4.7 17.55,-3.4 ; 17.55,-2.1 17.55,-3.4 ; C25.1 17.55,-3.4
NetC23_2: C23.2 C25.2 C28.2 R14.2 R20.1 U2.3 | length 9.6
  Top Layer w0.508: C28.2@19.7,-4.7 19.747,-4.653 23.057,-4.653 U2.3
  Top Layer w0.762: R14.2 18.395,-0.873 18.406,-0.884 19.184,-0.884 19.7,-1.4 19.7,-4.7 19.7,-5.995 R20.1
NetC26_2: C26.2 R17.2 U3.2 | length 5.5
  Top Layer w0.508: U3.2 36.535,-9.7 38.434,-11.599 39.189,-11.599 39.33,-11.74 39.33,-13.175 R17.2
NetC29_2: C29.2 C30.1 C31.2 C32.1 C34.2 C35.1 R27.1 | length 5.1
  Top Layer w0.762: C34.2 16.945,-12.577 16.995,-12.627 R27.1 ; C31.2 17.55,-10.1 ; 17.55,-11.4 17.55,-10.1 ; 17.55,-8.8 17.55,-10.1 ; C32.1 17.55,-10.1
NetC30_2: C30.2 C32.2 C35.2 R23.2 R28.1 U4.3 | length 9.6
  Top Layer w0.508: 19.645,-10.75 19.66,-10.735 U4.3@23.075,-10.735
  Top Layer w0.762: R23.2 18.39,-7.573 18.401,-7.584 19.184,-7.584 19.645,-8.045 C30.2 C32.2 19.645,-10.75 C35.2 19.645,-12.577 19.695,-12.627 R28.1
NetC33_2: C33.2 R26.2 U5.2 | length 6.4
  Top Layer w0.508: U5.2 35.865,-39.6 36.965,-38.5 C33.2 39.927,-38.472 39.927,-37.128 R26.2
NetC40_1: C40.1 C41.1 C42.1 C43.1 R30.1 R34.2 U6.2 | length 8.3
  Top Layer w0.508: R34.2@27,-25.795 26.978,-25.817 26.978,-27.1 26.978,-28.4 26.978,-29.7 26.978,-30.978 C40.1 26.93,-31.025 26.93,-32.275 R30.1 26.905,-32.395 27.035,-32.525 U6.2
NetC40_2: C40.2 C41.2 C42.2 C43.2 R30.2 R35.1 U6.1 | length 8.6
  Top Layer w0.508: C43.2 C42.2 C41.2 C40.2 28.47,-31.025 28.47,-32.275 R30.2 28.495,-32.395 28.323,-32.567 28.323,-33.957 U6.1 29.335,-33.975 29.705,-33.605 R35.1
NetC44_2: C44.2 R33.2 U7.1 U7.6 | length 9.4
  Top Layer w0.508: C44.2 45.973,-38.527 45.973,-39.672 R33.2 47.13,-39.7 47.225,-39.795 U7.1 48.1,-39.795 50.64,-42.335 U7.6
NetC45_2: C45.2 D3.A R37.1 U7.5 | length 5.9
  Top Layer w0.508: D3.A@53.575,-45.6 53.575,-43.655 53.525,-43.605 U7.5 53.143,-43.587 53.525,-43.587 54.768,-43.587 C45.2 R37.1
NetC50_1: C50.1 C51.1 C52.1 C53.1 R38.1 R42.2 U8.2 | length 8.1
  Top Layer w0.508: U8.2 19.92,-33.96 19.92,-32.315 R38.1 19.953,-32.252 19.953,-31 19.953,-29.7 19.953,-28.4 19.953,-27.1 19.953,-25.942 R42.2@20,-25.895
NetC50_2: C50.2 C51.2 C52.2 C53.2 R38.2 R43.1 U8.1 | length 7.7
  Top Layer w0.508: U8.1 R43.1@22.235,-33.975 ; U8.1@21.223,-33.63 21.223,-32.667 21.495,-32.395 R38.2 21.47,-32.275 21.47,-31 21.47,-29.7 21.47,-28.4 21.47,-27.125 C53.2
NetC54_2: C54.2 R41.2 U9.1 U9.6 | length 9.6
  Top Layer w0.508: C54.2 46.022,-30.322 46.022,-31.582 R41.2 46.095,-31.605 46.267,-31.777 48.082,-31.777 50.64,-34.335 U9.6
NetC55_2: C55.2 D4.A R45.1 U9.5 | length 5.1
  Top Layer w0.508: D4.A 53.1,-37.475 53.1,-35.63 U9.5 53.143,-35.623 54.668,-35.623 C55.2 R45.1
NetD2_A: D2.A Q6.3 | length 4.2
  Top Layer w0.254: D2.A 3.936,-39.806 4.781,-39.806 6.463,-41.488 6.715,-41.488 6.9,-41.673 Q6.3
NetD2_K: D2.K R24.2 | length 1.6
  Top Layer w0.254: D2.K R24.2
NetPOT1_1: POT1.1 U4.1 U4.2 | length 34.1
  Top Layer w0.508: POT1.1 5.5,-26.7 8.5,-26.7 20.886,-14.314 22.286,-14.314 24.5,-12.1 24.5,-10.7 24.5,-9.128 24.202,-8.83 23.075,-8.83
  Top Layer w0.762: U4.2@23.075,-9.465 23.075,-8.83 U4.1@23.075,-8.195
NetPOT1_2: POT1.2 U4.6 | length 32.5
  Top Layer w0.508: v1(13.8,-25.4) 14.3,-25.4 26.9,-12.8 26.9,-11.935 28.1,-10.735 U4.6@28.525,-10.735
  Bottom Layer w0.508: POT1.2 4.6,-25.4 v1(13.8,-25.4)
NetPOT1_4: POT1.4 U2.1 U2.2 | length 36.6
  Top Layer w0.508: POT1.4 8.55,-29 9.017,-28.533 9.067,-28.533 25.3,-12.3 25.3,-3.6 24.43,-2.73 23.075,-2.73
  Top Layer w0.762: U2.2 23.075,-2.73 U2.1
NetPOT1_5: POT1.5 U2.6 | length 32.9
  Top Layer w0.508: v1(14.6,-24.1) 14.6,-24 26.1,-12.5 26.1,-4.933 26.398,-4.635 U2.6
  Bottom Layer w0.508: POT1.5 8.3,-24.1 v1(14.6,-24.1)
NetQ3_D: Q3.3 R15.2 | length 2.1
  Top Layer w0.508: Q3.3 57.25,-2.98 57.311,-2.919 57.397,-2.919 57.695,-2.621 R15.2
NetQ4_B: Q4.B R16.2 | length 2.5
  Top Layer w0.508: R16.2 38.095,-17.809 38.211,-17.925 40.375,-17.925 Q4.B
NetQ5_B: Q5.B R22.2 | length 2.5
  Top Layer w0.508: Q5.B 33.39,-18.24 34.29,-18.24 35.155,-19.105 R22.2
NetQ6_G: Q6.1 R18.1 R21.2 | length 6.1
  Top Layer w0.254: R18.1 6.028,-45.323 6.028,-43.953 Q6.1 5.95,-43.763 6.135,-43.578 6.95,-43.578 7.832,-42.695 R21.2
NetQ6_S: Q6.2 R18.2 | length 1.6
  Top Layer w0.254: R18.2 7.773,-45.323 7.773,-43.953 Q6.2
NetQ7_B: Q7.B R25.2 | length 2.1
  Top Layer w0.508: R25.2 37.895,-31.5 39.7,-31.5 Q7.B
NetQ8_B: Q8.B R29.2 | length 2.9
  Top Layer w0.508: Q8.B 32.612,-31.288 34.012,-31.288 34.905,-30.395 R29.2
NetR1_1: R1.1 U3.1 | length 1.8
  Top Layer w0.508: U3.1 38.93,-9.275 39.305,-8.9 R1.1
NetR2_1: R2.1 U3.5 | length 1.7
  Top Layer w0.508: R2.1 32.495,-15.095 32.865,-14.725 U3.5
NetR5_1: R5.1 U5.1 | length 1.7
  Top Layer w0.508: R5.1 33.095,-40.395 33.465,-40.025 U5.1
NetR6_1: R6.1 U5.5 | length 1.7
  Top Layer w0.508: U5.5 39.535,-34.575 39.905,-34.205 R6.1
NetR12_1: R12.1 R21.1 U1.6 | length 96
  Top Layer w0.254: R21.1 10.77,-41.105 12.765,-43.1 U1.6 12.765,-43.95 15.215,-46.4 42.95,-46.4 43.75,-47.2 54.7,-47.2 63.8,-38.1 63.8,-10.579 63.269,-10.048 62.331,-10.048 61.527,-10.852 56.657,-10.852 R12.1
NetR16_1: R16.1 R22.1 U3.6 | length 5.6
  Top Layer w0.508: U3.6 35.283,-14.743 35.283,-17.283 35.589,-17.589 36.389,-17.589 36.505,-17.705 R16.1 36.505,-17.895 36.629,-18.019 36.629,-19.084 R22.1
NetR25_1: R25.1 R29.1 U5.6 | length 5.1
  Top Layer w0.508: R25.1 36.205,-31.695 36.321,-31.811 36.723,-31.811 37.021,-32.109 37.021,-32.122 37.135,-32.236 U5.6 ; R25.1@36.305,-31.695 36.305,-31.405 36.379,-31.331 36.379,-30.416 R29.1 R29.1@36.5,-30.305
NetR32_2: R32.2 R33.1 R36.2 U7.2 | length 4.5
  Top Layer w0.508: R32.2 44.698,-39.802 44.698,-41.197 R36.2 44.745,-41.245 46.14,-41.245 46.302,-41.083 47.657,-41.083 U7.2
NetR40_2: R40.2 R41.1 R44.2 U9.2 | length 4.5
  Top Layer w0.508: R40.2 R44.2 44.742,-33.147 45.952,-33.147 R41.1 46.095,-33.195 46.225,-33.065 U9.2
NetU2_7: U2.7 U3.3 | length 10.1
  Top Layer w0.508: v1(32.315,-7.315) 32.33,-7.3 34.1,-7.3 35.247,-8.447 35.247,-9.257 U3.3
  Bottom Layer w0.508: v1(28.525,-3.365) 28.543,-3.383 29.183,-3.383 32.3,-6.5 32.3,-7.3 v1(32.315,-7.315)
NetU4_7: U4.7 U5.3 | length 34.4
  Top Layer w0.508: U4.7@28.525,-9.465 28.95,-9.465 31.2,-11.715 v1@31.2,-34.1 ; v1(37.117,-40.043) U5.3
  Bottom Layer w0.508: v1@31.2,-34.1 v1(31.2,-34.125) v1(37.117,-40.043)
Out1: *1.6 C26.1 POT1.6 Q4.E Q5.E R17.1 R40.1 R42.1 | length 77.2
  Top Layer w0.381: R40.1 43.105,-28.095 50.6,-20.6
  Top Layer w0.508: C26.1 40.87,-11.825 40.87,-13.175 R17.1 40.895,-13.295 43.071,-15.471 43.071,-21.529
  Top Layer w1.016: Q5.E Q4.E 40.593,-22.457 42.143,-22.457 43.071,-21.529 44,-20.6 50.6,-20.6 *1.6
  Bottom Layer w0.381: POT1.6 21.2,-19 24.75,-22.55 ; v1(21.5,-25.8) 24.75,-22.55 ; Q5.E 24.75,-22.55
Out2: *1.3 C33.1 POT1.3 Q7.E Q8.E R26.1 R32.1 R34.1 | length 62.5
  Top Layer w0.508: Q7.E@39.8,-26.85 Q7.E 41.49,-28.59 R26.1 41.467,-37.122 41.467,-38.477 C33.1 41.445,-38.535 42.499,-39.589 42.989,-39.589 43.105,-39.705 R32.1
  Top Layer w1.016: Q8.E@32.5,-26.85 Q7.E@39.8,-26.85 ; Q7.E 43.75,-22.95 45.15,-22.95 *1.3
  Bottom Layer w0.381: POT1.3 5.5,-21.3 15.4,-21.3 20.8,-26.7 27.6,-26.7 v1(28.5,-25.8) 29.6,-26.9 Q8.E
RELAY: *1.1 R15.1 | length 11.4
  Top Layer w0.508: *1.1 46.7,-1.4 R15.1
pads on no net: *1.2 *1.7 J1.4 J1.5 U1.1 U1.5 U1.8 U3.8 U5.8

## Polygon pours and split planes (outlines as drawn)
GND on Top Layer "Top Layer-No Net" (solid, pour order 0): 0,-48 0,0 65,0 65,-48
GND on Bottom Layer "Top Layer-No Net1" (solid, pour order 1): 0,-48 0,0 65,0 65,-48

## Silkscreen, mask and mechanical layers (free items; w line width, h text height)
Mechanical 1:
  the board outline again, w0.152